# Allegro board test_fixture_2.brd
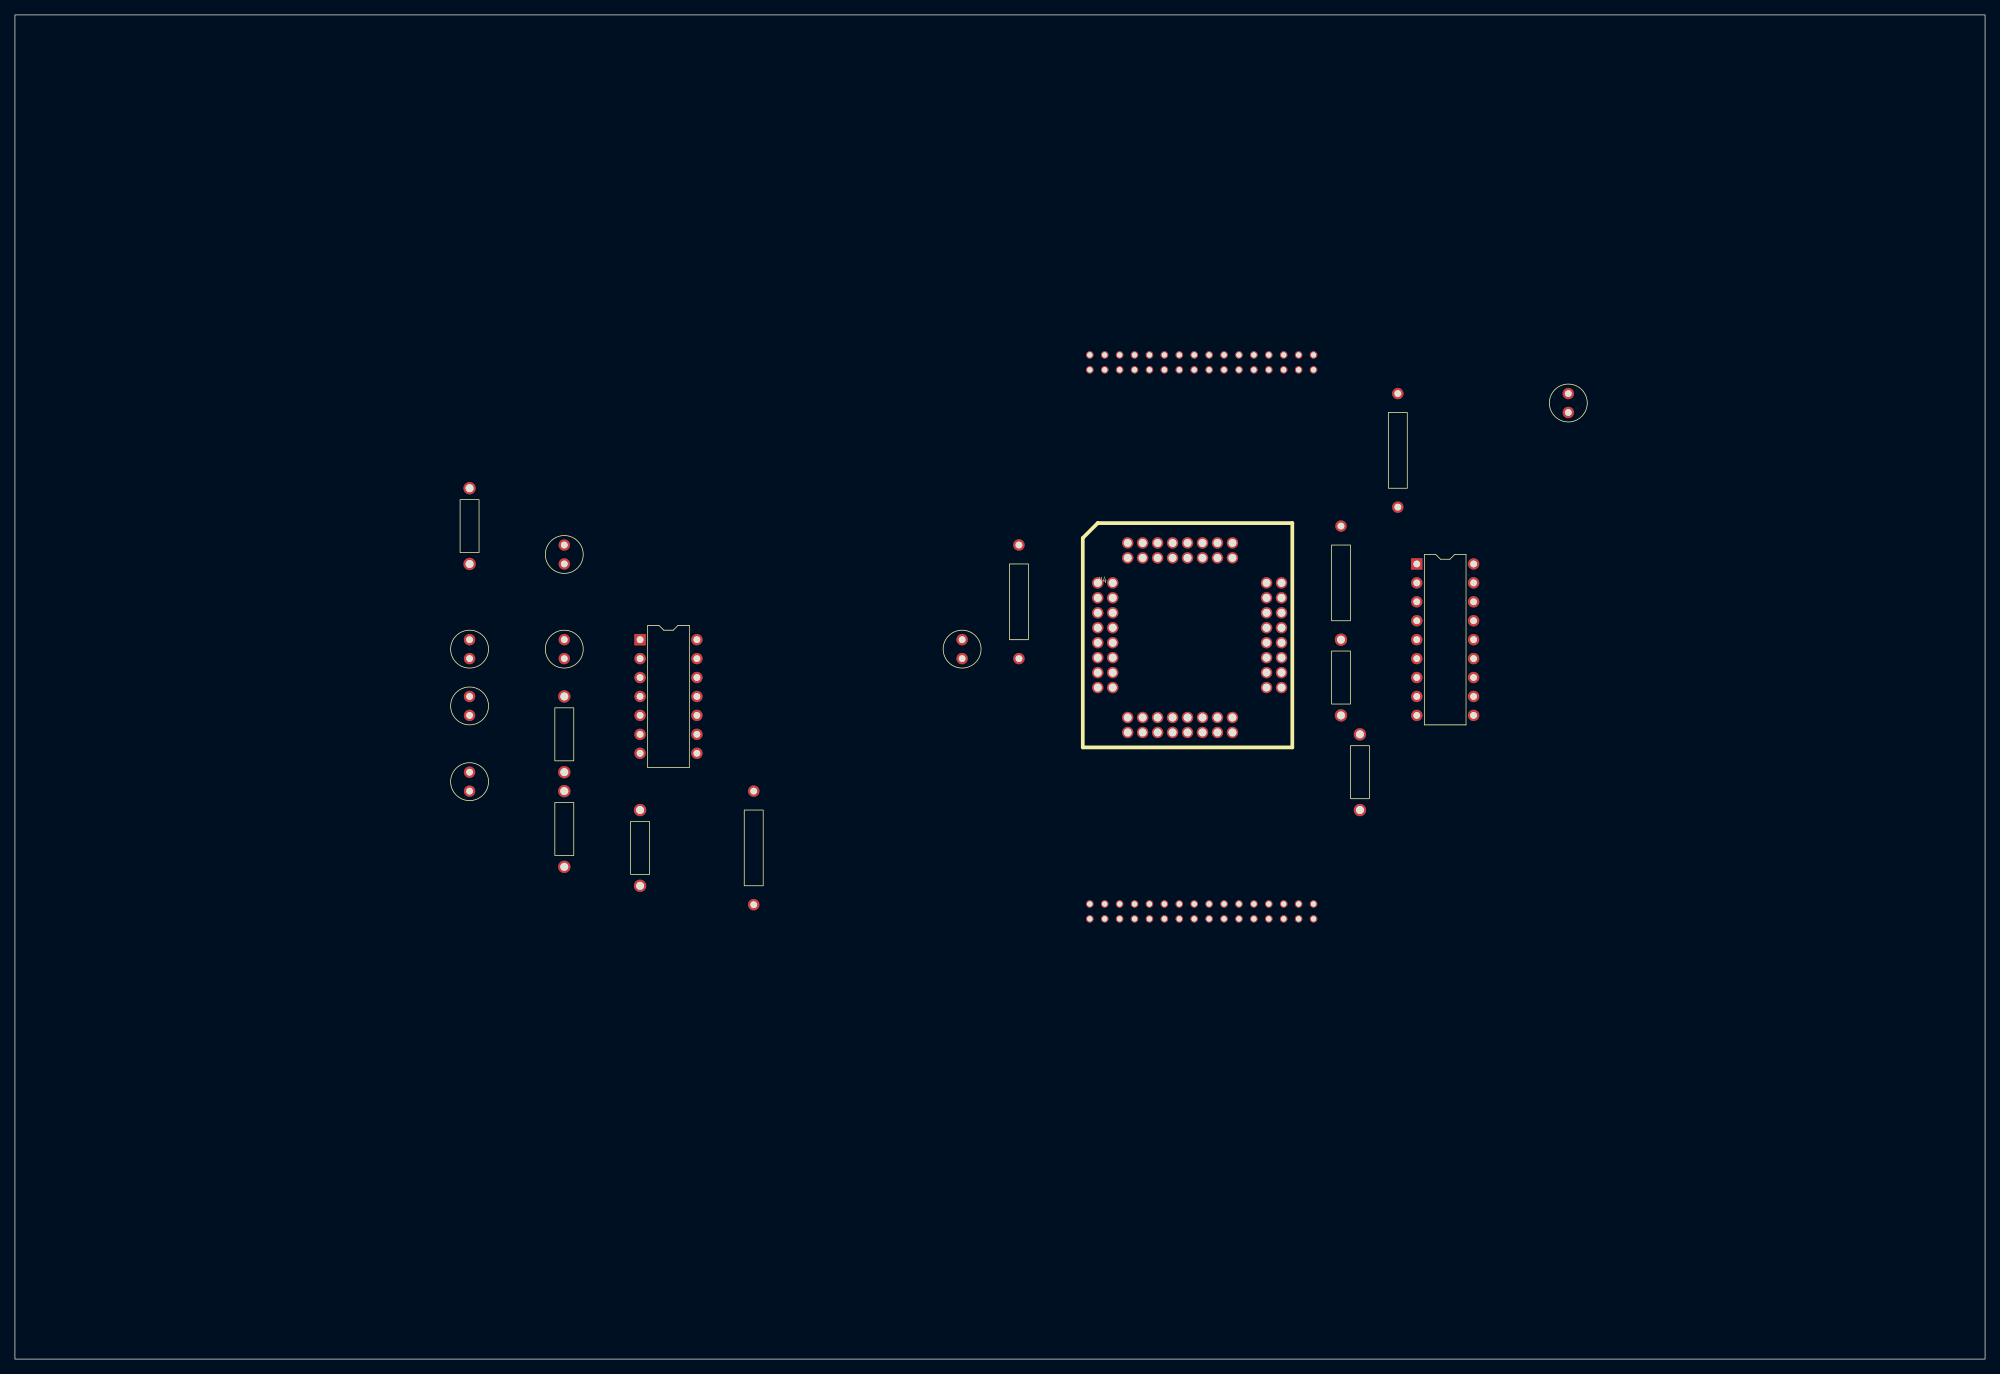
[diagram p0: board, top side]
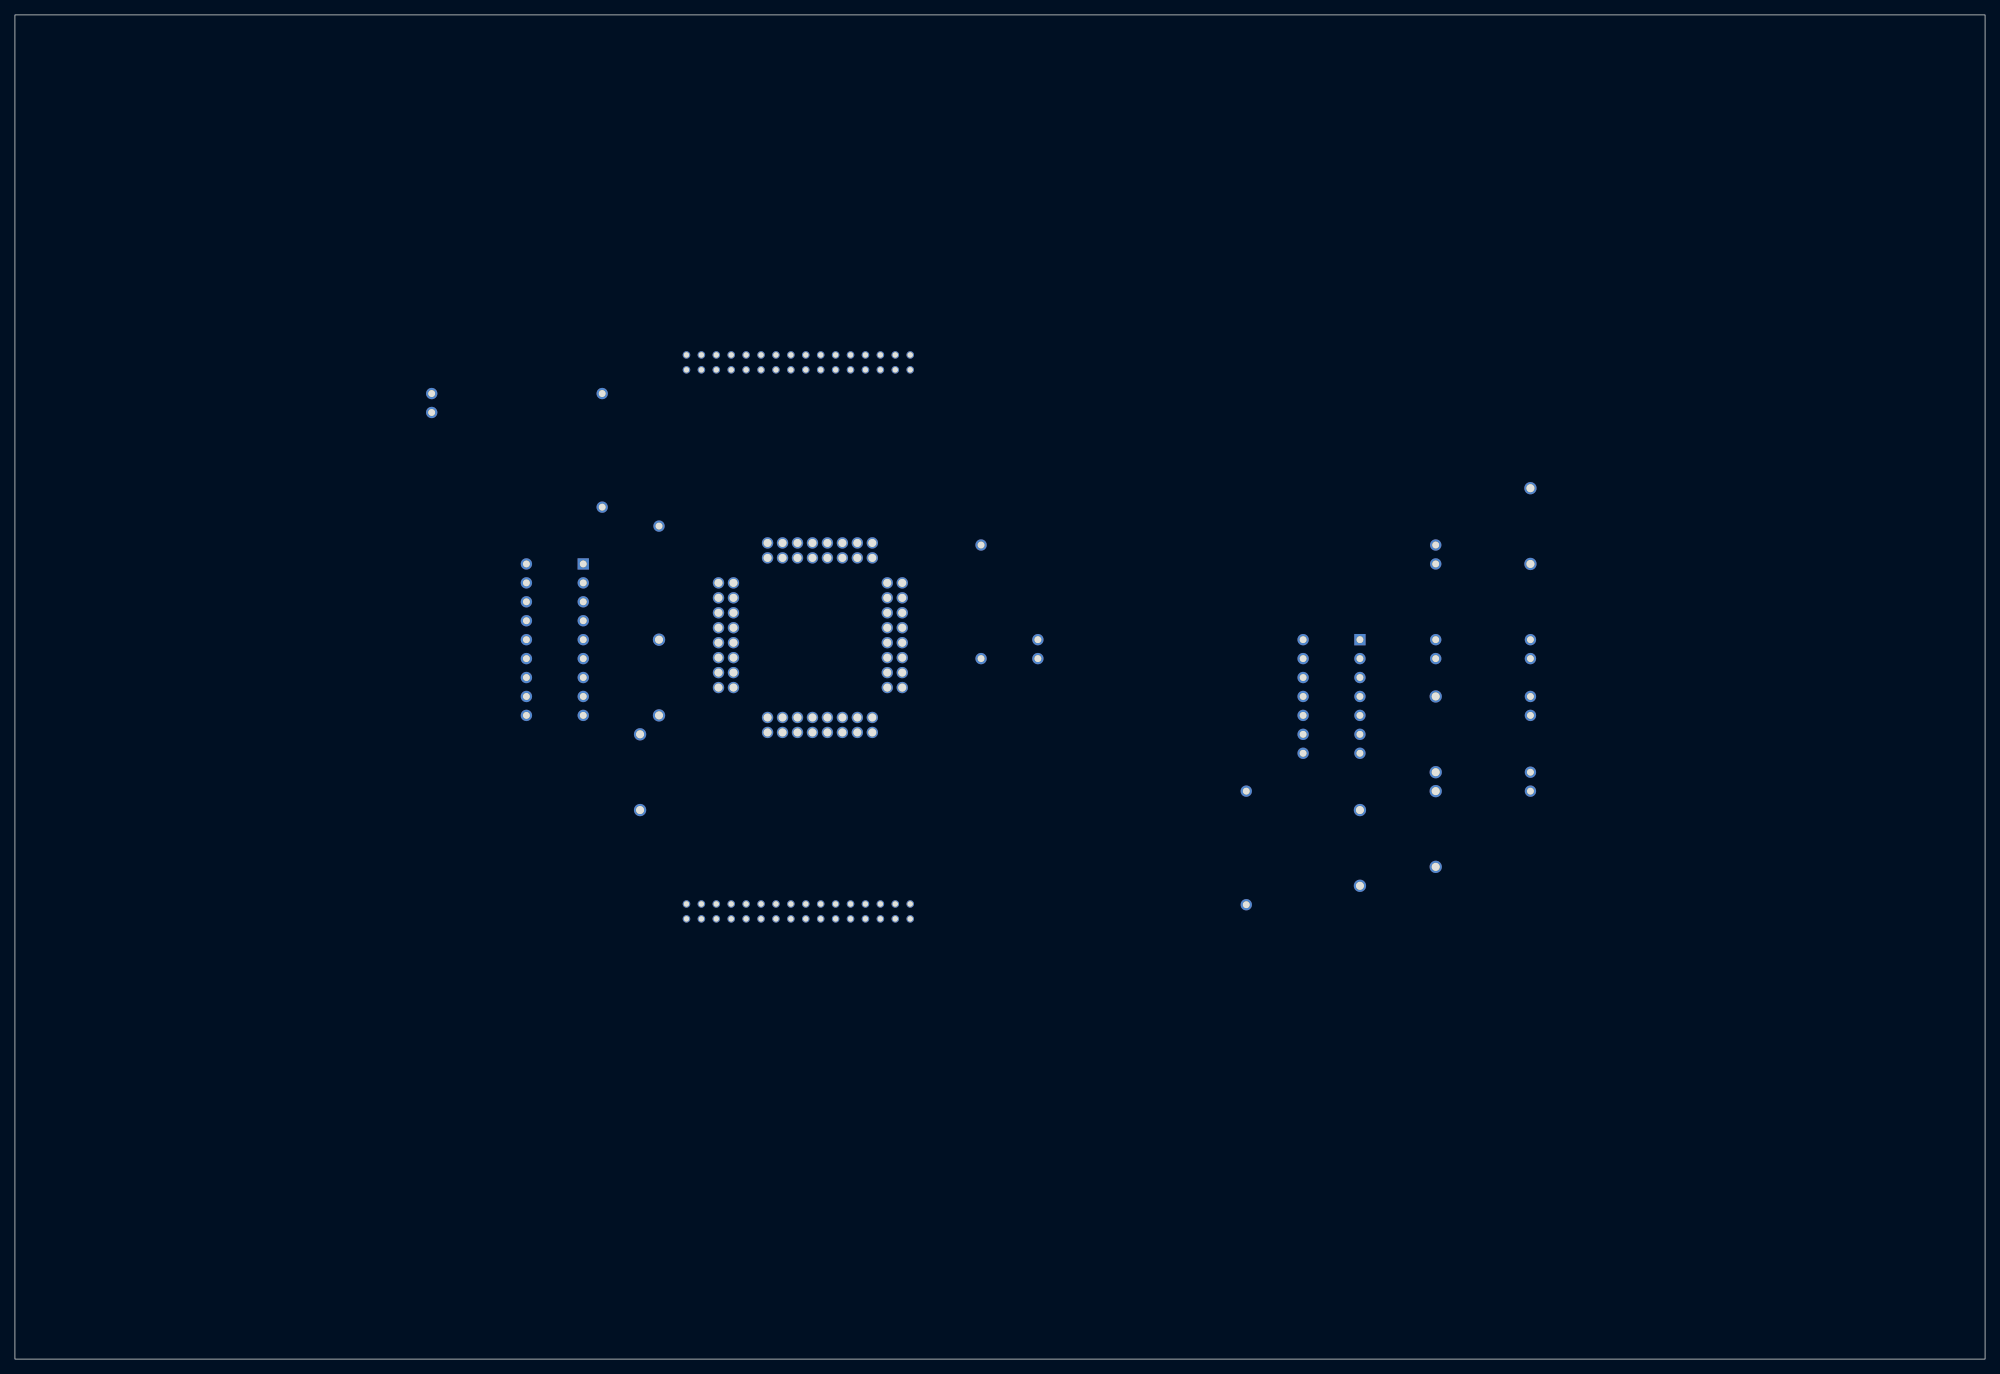
[diagram p1: board, bottom side, seen from below]

Outline 264.16 x 180.34 mm; copper layers: TOP, BOTTOM. Coordinates in mm from the lower left corner of the outline.
Outline path: rectangle 0,0 264.16,180.34

## Placement (name value [footprint] x y rotation side)
C1  0.1u  [RES400]  60.96 106.68 0 top
C2  10u  [CAP196]  60.96 93.98 0 top
C3  0.1u  [CAP196]  73.66 106.68 0 top
C4  0.1u  [CAP196]  73.66 93.98 0 top
C5  0.1u  [CAP196]  60.96 86.36 0 top
C6  10u  [CAP196]  127 93.98 0 top
C7  0.1u  [CAP196]  60.96 76.2 0 top
C16  0.1u  [CAP196]  208.28 127 0 top
J1  HEADER 32  [32_PINS_CIR_CONN_RIGHT_ANGLE]  -55.88 -81.28 0 top
J3  HEADER 32  [32_PINS_CIR_CONN_RIGHT_ANGLE]  -55.88 -154.94 0 top
NOREF  -  []  0 180.34 0 top
NOREF#2  -  []  10.16 170.18 0 top
NOREF#3  -  []  264.16 0 90 top
NOREF#4  -  []  254 10.16 90 top
R1  100k  [RES400]  180.34 73.66 0 top
R2  1.26k  [RES400]  73.66 78.74 0 top
R3  100k  [RES400]  177.8 86.36 0 top
R4  22.17k  [RES400]  73.66 66.04 0 top
R5  11.1k  [RES400]  83.82 63.5 0 top
R8  10k  [RES600]  177.8 109.22 0 top
R9  10k  [RES600]  185.42 127 0 top
R10  10k  [RES600]  134.62 106.68 0 top
R11  10k  [RES600]  99.06 73.66 0 top
U1  LM124A  [DIP14_3]  83.82 96.52 0 top
U3  MAX3222  [DIP18_3]  187.96 106.68 0 top
U4  MC9S08QE128_64  [MC9S08QE128_V2]  137.16 104.14 0 top

## Library data of the parts
C1-C7 C16 = C: Tolerance: ***; User Part Number: ***
J1 J3 = HEADER 32
R1-R5 = R: Tolerance: ***; User Part Number: ***
R8-R11 = RESISTOR: Tolerance: ***; User Part Number: ***
U1 = LM124A: Tolerance: ***; User Part Number: ***
U3 = MAX3222_2: Tolerance: ***; User Part Number: ***
U4 = MC9S08QE128_11

## Footprints (pads in the part's own frame, mm; a bottom-side part is the same pattern mirrored in y, then rotated)
32_PINS_CIR_CONN_RIGHT_ANGLE
  round 1.016 hole 0.711: 1(200,216) 2(200,214) 3(202,216) 4(202,214) 5(204,216) 6(204,214) 7(206,216) 8(206,214) 9(208,216) 10(208,214) 11(210,216) 12(210,214) 13(212,216) 14(212,214) 15(214,216) 16(214,214) 17(216,216) 18(216,214) 19(218,216) 20(218,214) 21(220,216) 22(220,214) 23(222,216) 24(222,214) 25(224,216) 26(224,214) 27(226,216) 28(226,214) 29(228,216) 30(228,214) 31(230,216) 32(230,214)
CAP196
  round 1.524 hole 0.914: 1(0,0) 2(0,2.54)
DIP14_3
  rect 1.524x1.524 hole 0.914: 1(0,0)
  round 1.524 hole 0.914: 2(0,-2.54) 3(0,-5.08) 4(0,-7.62) 5(0,-10.16) 6(0,-12.7) 7(0,-15.24) 8(7.62,-15.24) 9(7.62,-12.7) 10(7.62,-10.16) 11(7.62,-7.62) 12(7.62,-5.08) 13(7.62,-2.54) 14(7.62,0)
DIP18_3
  rect 1.524x1.524 hole 0.914: 1(0,0)
  round 1.524 hole 0.914: 2(0,-2.54) 3(0,-5.08) 4(0,-7.62) 5(0,-10.16) 6(0,-12.7) 7(0,-15.24) 8(0,-17.78) 9(0,-20.32) 10(7.62,-20.32) 11(7.62,-17.78) 12(7.62,-15.24) 13(7.62,-12.7) 14(7.62,-10.16) 15(7.62,-7.62) 16(7.62,-5.08) 17(7.62,-2.54) 18(7.62,0)
MC9S08QE128_V2
  round 1.524 hole 1.067: 1(8.026,0) 2(10.033,0) 3(8.026,-2.007) 4(10.033,-2.007) 5(8.026,-4.013) 6(10.033,-4.013) 7(8.026,-6.02) 8(10.033,-6.02) 9(8.026,-8.026) 10(10.033,-8.026) 11(8.026,-10.033) 12(10.033,-10.033) 13(8.026,-12.04) 14(10.033,-12.04) 15(8.026,-14.046) 16(10.033,-14.046) 17(12.04,-20.066) 18(12.04,-18.059) 19(14.046,-20.066) 20(14.046,-18.059) 21(16.053,-20.066) 22(16.053,-18.059) 23(18.059,-20.066) 24(18.059,-18.059) 25(20.066,-20.066) 26(20.066,-18.059) 27(22.073,-20.066) 28(22.073,-18.059) 29(24.079,-20.066) 30(24.079,-18.059) 31(26.086,-20.066) 32(26.086,-18.059) 33(32.664,-14.046) 34(30.658,-14.046) 35(32.664,-12.04) 36(30.658,-12.04) 37(32.664,-10.033) 38(30.658,-10.033) 39(32.664,-8.026) 40(30.658,-8.026) 41(32.664,-6.02) 42(30.658,-6.02) 43(32.664,-4.013) 44(30.658,-4.013) 45(32.664,-2.007) 46(30.658,-2.007) 47(32.664,0) 48(30.658,0) 49(26.086,5.359) 50(26.086,3.353) 51(24.079,5.359) 52(24.079,3.353) 53(22.073,5.359) 54(22.073,3.353) 55(20.066,5.359) 56(20.066,3.353) 57(18.059,5.359) 58(18.059,3.353) 59(16.053,5.359) 60(16.053,3.353) 61(14.046,5.359) 62(14.046,3.353) 63(12.04,5.359) 64(12.04,3.353)
RES400
  round 1.651 hole 1.067: 1(0,0) 2(0,10.16)
RES600
  round 1.524 hole 0.914: 1(0,-12.7) 2(0,2.54)

## Nets
12V: C16.2
GND: U3.16
GND_POWER: C16.1
GND_SIGNAL: C1.1 C3.1 C4.1 J1.9 J1.10 J1.11 J3.22 R3.1 U1.11(V-) U4.9(VREFL) U4.10(VSSAD) U4.11(VSS_2) U4.41(VSS)
VCC: C1.2 J1.6 J1.7 J1.8 R1.2 R8.1 R9.1 R10.2 R11.2 U1.4(V+) U3.1(E\N\) U3.17(VCC) U3.18(S\H\D\N\) U4.6(VDD) U4.7(VDDAD) U4.8(VREFH) U4.40(VDD_2)
VIN: C6.1
ADP9: J3.21 U4.37(PTA7/TPM2CH2/ADP9)
MISO2: J3.6 U4.46(PTD2/KBI2P2/MISO2)
MOSI1: J3.28 U4.59(PTE1/MOSI1)
MOSI2: J1.1 U4.1(PTD1/KBI2P1/MOSI2)
PTE4: J3.18 U4.39(PTE4)
R1IN: U3.14(R1IN)
R1OUT: U3.13(R1OUT) U4.34(PTB0/KBI1P4/RXD1/ADP4)
R2IN: U3.9(R2IN)
R2OUT: U3.10(R2OUT) U4.52(PTC6/RXD2/ACMP2+)
RXD1: J3.2
RXD2: J3.13
SPSCK1: J3.29 U4.60(PTE0/TPM2CLK/SPSCK1)
SPSCK2: J1.2 U4.2(PTD0/KBI2P0/SPSCK2)
SS2_N: J3.10 U4.45(PTD3/KBI2P3/S\S\2\)
T1OUT: U3.15(T1OUT)
T2OUT: U3.8(T2OUT)
TXD1: J3.1 U3.12(T1IN) U4.33(PTB1/KBI1P5/TXD1/ADP5)
TXD2: J3.12 U3.11(T2IN) U4.51(PTC7/TXD2/ACMP2-)
VOUT: C2.2 J3.11 U4.50(PTA0/KBI1P0/TPM1CH0/ADP0/ACMP1)
N05337: J1.4 R11.1 U4.4(PTH6/SCL2)
N15041: U3.2(C1+)
N15045: U3.4(C1-)
N15127: U3.5(C2+)
N15131: U3.6(C2-)
N15240: U3.3(V+)
N15268: U3.7(V-)
N18999: C3.2 R1.1 R3.2 U1.2(-)
N19124: C4.2 R2.2 U1.1(OUT) U1.3(+) U1.5(+)
N19488: C5.1 C7.1 R2.1 R5.1
N19578: C5.2 R4.2 U1.6(-)
N19618: C2.1 C7.2 R4.1 U1.7(OUT)
N19633: C6.2 R5.2
N22932: J1.5 U4.5(PTE7/TPM3CLK)
N24595: J3.14 U4.53(PTE3/S\S\1\)
N24653: J1.31 U4.54(PTE2/MISO1)
N25786: J1.12 U4.12(PTB7/SCL1/EXTAL)
N25790: J1.13 U4.13(PTB6/SDA1/XTAL)
N49174: J3.3 U4.35(PTF3/ADP13)
N49178: J3.4 U4.36(PTF2/ADP12)
N49182: J3.5 U4.44(PTD4/KBI2P4)
N49186: J3.7 R8.2 U4.47(PTA3/KBI1P3/SCL1/ADP3)
N49190: J3.8 R9.2 U4.48(PTA2/KBI1P2/SDA11/ADP2)
N50365: J1.3 R10.1 U4.3(PTH7/SDA2)
N52935: J3.9 U4.49(PTA1/KBI1P1/TPM2CH0/ADP1/ACMP1)
N55207: J3.15 U4.55(PTG3/ADP19)
N55211: J3.16 U4.63(PTA5/IRQ/TPM1CLK/R\E\S\E\T\\)
N55215: J3.17 U4.64(PTA4/ACMP1O/BKGD/MS)
N55219: J3.19 U4.28(PTF6/ADP16)
N55223: J3.20 U4.29(PTF5/ADP15)
N55410: J3.23 U4.42(PTF1/ADP11)
N55414: J3.24 U4.43(PTF0/ADP10)
N55418: J3.25 U4.30(PTF4/ADP14)
N55422: J3.26 U4.31(PTB3/KBI1P7/MOSI1/ADP7)
N55426: J3.27 U4.32(PTB2/KBI1P6/SPSCK1/ADP6)
N55430: J3.30 U4.62(PTC4/TPM3CH4/R\S\T\O\)
N55434: J3.31 U4.61(PTC5/TPM3CH5/ACMP2O)
N55502: J1.14 U4.14(PTH1)
N55506: J1.15 U4.15(PTH0)
N55510: J1.16 U4.16(PTE6)
N55514: J1.17 U4.17(PTE5)
N55518: J1.18 U4.18(PTB5/TPM1CH1/SS1\)
N55522: J1.19 U4.19(PTB4/TPM2CH1/MISO1)
N55526: J1.20 U4.20(PTC3/TPM3CH3)
N55530: J1.21 U4.21(PTC2/TPM3CH2)
N55534: J1.22 U4.22(PTD7/KBI2P7)
N55538: J1.23 U4.23(PTD6/KBI2P6)
N55542: J1.24 U4.24(PTD5/KBI2P5)
N55546: J1.25 U4.25(PTC1/TPM3CH1)
N55550: J1.26 U4.26(PTC0/TPM3CH0)
N55554: J1.27 U4.27(PTF7/ADP17)
N55558: J1.28 U4.56(PTG2/ADP18)
N55562: J1.29 U4.57(PTG1)
N55566: J1.30 U4.58(PTG0)
N55570: J1.32 U4.38(PTA6/TPM1CH2/ADP8)

Pads without a net: J3 32; U1 8 9 10 12 13 14
